# Allegro board P1_PCB_rev1.brd
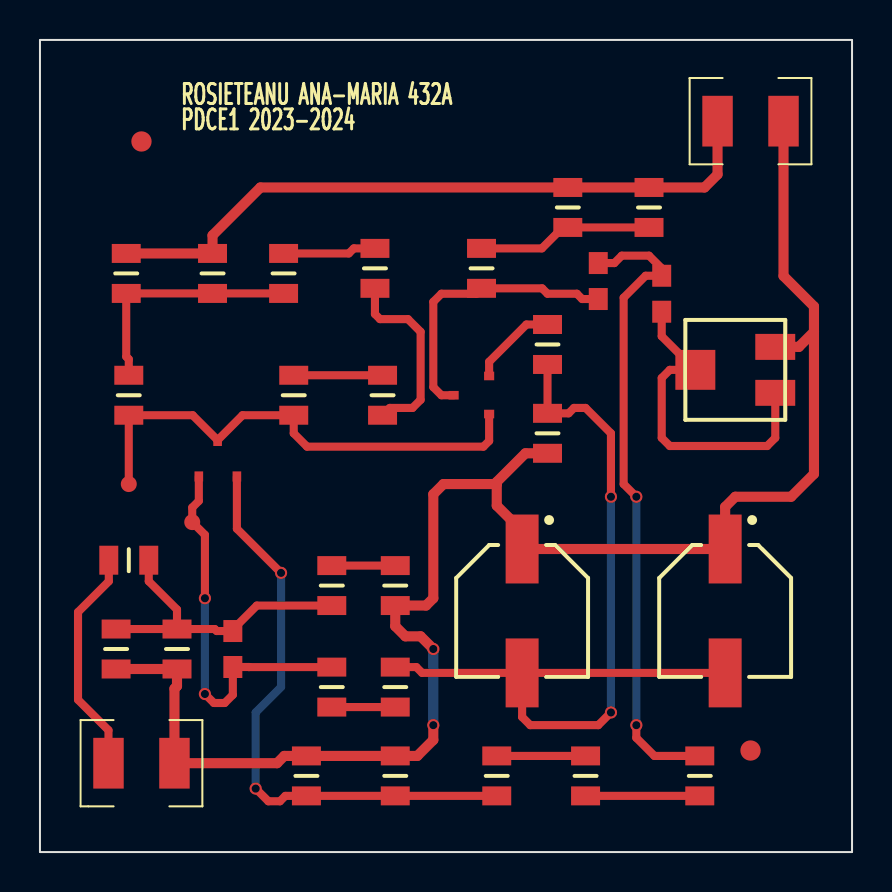
[diagram p0: board, top side]
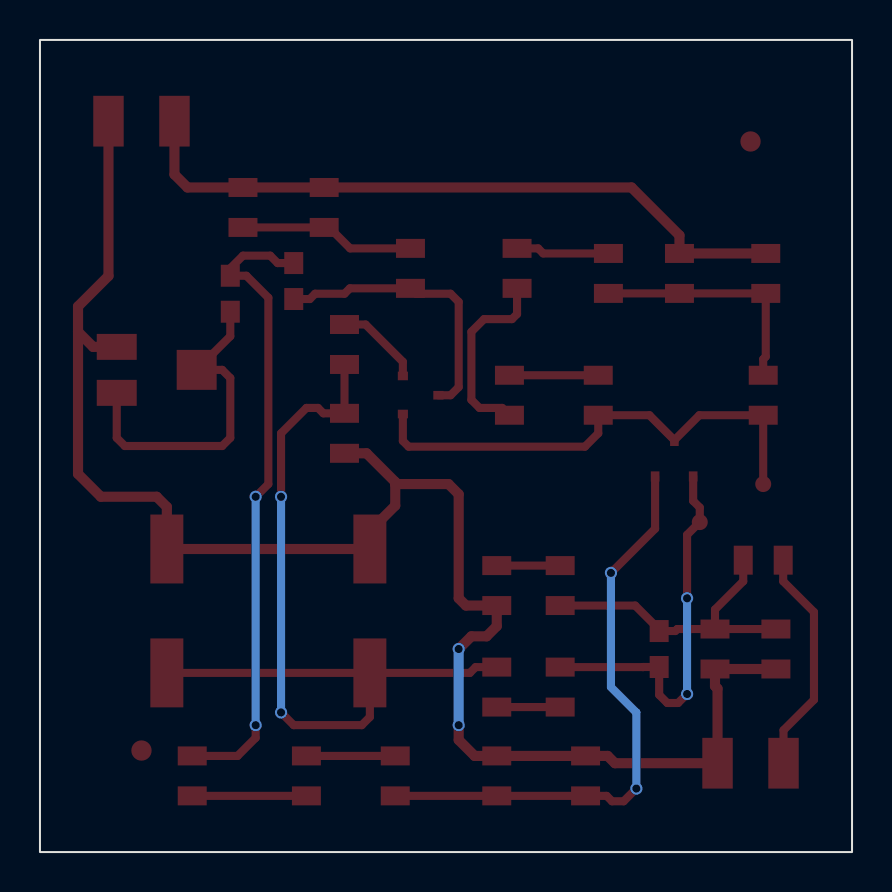
[diagram p1: board, bottom side, seen from below]

Outline 40.64 x 40.64 mm; copper layers: TOP, BOTTOM. Coordinates in mm from the lower left corner of the outline.
Outline path: rectangle 0,0 40.64,40.64

## Design rules (mm)
nets with their own width: min track width 0.406; nets N14891 N15039 N15045 N15123 N15129 N15133 N15223 N15237 N15255 N15309 N15347 N15389 N15489 N15493 N15505 N15537 N15769 N16037 N16043
nets with their own width: min track width 0.508; nets 0 VCC

## Placement (name value [footprint] x y rotation side)
C1  4.7u  [CAPC2008X126N_0805]  9.65 10.16 270 top
C2  4.7u  [CAPC2008X126N_0805]  27.94 28.57 90 top
C3  4.7u  [CAPC2008X126N_0805]  31.11 27.94 270 top
C4  10u  [CAPAE660X770N]  24.13 12.06 270 top
C5  10u  [CAPAE660X770N]  34.29 12.06 270 top
J1  CON2  [1210RF_WV_12D]  5.08 4.45 180 top
J2  CON2  [1210RF_WV_12D]  35.56 36.58 0 top
NOREF  Value  [unnamed]  5.08 35.56 0 top
NOREF#2  Value  [unnamed]  35.56 5.08 0 top
Q1  BC846B  [SOT23]  8.89 19.68 90 top
Q2  BC846B  [SOT23]  21.59 22.86 180 top
R1  100k  [RES2012X50N_0805]  6.86 10.16 90 top
R2  180k  [RES2012X50N_0805]  17.14 22.86 90 top
R3  2k  [RES2012X50N_0805]  13.34 3.81 270 top
R4  10k  [RES2012X50N_0805]  22.1 29.21 90 top
R5  1k  [RES2012X50N_0805]  25.4 20.95 90 top
R6  180k  [RES2012X50N_0805]  14.61 8.26 90 top
R7  22k  [RES2012X50N_0805]  22.86 3.81 270 top
R9  1  [RES2012X50N_0805]  25.4 25.4 90 top
R11  100k  [RES2012X50N_0805]  4.45 14.61 0 top
R12  1k  [RES2012X50N_0805]  14.61 13.34 270 top
R13  220k  [RES2012X50N_0805]  4.32 28.96 270 top
R14  50k  [TRIM_BI_23AN]  34.8 24.13 0 top
R15  68k  [RES2012X50N_0805]  33.02 3.81 90 top
R17  10k  [RES2012X50N_0805]  27.3 3.81 270 top
R18  150k  [RES2012X50N_0805]  8.64 28.96 270 top
R19  220k  [RES2012X50N_0805]  4.45 22.86 90 top
R20  180k  [RES2012X50N_0805]  17.78 8.26 90 top
R22  10k  [RES2012X50N_0805]  26.42 32.26 90 top
R23  10k  [RES2012X50N_0805]  30.48 32.26 90 top
R24  3.3k  [RES2012X50N_0805]  17.78 13.34 90 top
R25  2k  [RES2012X50N_0805]  17.78 3.81 270 top
R26  15k  [RES2012X50N_0805]  12.19 28.96 270 top
R27  15k  [RES2012X50N_0805]  12.7 22.86 270 top
R28  10k  [RES2012X50N_0805]  16.76 29.21 90 top
R29  100k  [RES2012X50N_0805]  3.81 10.16 90 top
TP1  CON1  [TP80]  7.62 16.51 0 top
TP2  CON1  [TP80]  4.45 18.41 0 top

## Library data of the parts
C1-C5 = C
J1 J2 = CON2
Q1 Q2 = BC846B
R1-R7 R9 R11-R13 R15 R17-R20 R22-R29 = R
R14 = POT
TP1 TP2 = CON1

## Footprints (pads in the part's own frame, mm; a bottom-side part is the same pattern mirrored in y, then rotated)
1210RF_WV_12D
  rect 1.524x2.54 smd: 1(-1.651,0) 2(1.651,0)
CAPAE660X770N
  rect 3.45x1.65 smd: 1(-3.1,0) 2(3.1,0)
CAPC2008X126N_0805
  rect 1.1x0.95 smd: 1(-0.9,0) 2(0.9,0)
RES2012X50N_0805
  rect 0.95x1.45 smd: 1(-1,0) 2(1,0)
SOT23
  rect 0.508x0.432 smd: 1(-0.889,0.94) 2(-0.889,-0.965) 3(0.889,0)
TP80
  round 0.8 smd: 1(0,0)
TRIM_BI_23AN
  rect 2x1.3 smd: 1(2,1.15) 2(2,-1.15)
  rect 2x2 smd: 3(-2,0)
unnamed
  round 1.016 smd: 1(0,0)

## Nets
VCC: J2.1 R13.1 R18.1 R22.2 R23.2
0: C4.1 C5.1 J1.1 J2.2 R1.1 R3.1 R5.1 R14.1 R24.1 R25.1 R29.1
N14891: R13.2 R18.2 R19.2 R26.2
N15039: R26.1 R28.2
N15045: R4.2 R22.1 R23.1
N15123: R2.1 R28.1
N15129: C2.1 Q2.3 R4.1
N15133: Q1.3 Q2.1 R19.1 R27.2 TP2.1
N15223: C2.2 C3.1 R15.2
N15237: C3.2 R14.2(T) R14.3
N15255: R2.2 R27.1
N15309: Q2.2(E) R9.2
N15347: C1.2 Q1.1 R6.2 TP1.1
N15389: Q1.2(E) R3.2 R7.2 R25.2
N15489: C4.2 C5.2 R5.2 R9.1 R20.2
N15493: J1.2 R11.1
N15505: C1.1 R1.2 R11.2 R12.2 R29.2
N15537: R6.1 R20.1
N15769: R12.1 R24.2
N16037: R7.1 R17.1
N16043: R15.1 R17.2

Pads without a net: NOREF 1; NOREF#2 1

## Via types
v1: diameter 0.61, hole 0.406, TOP to BOTTOM, 10 vias

## Routing (per net, layer and track width the routed paths; a pad name or vN(x,y) marks a point on that pad's centre or on a via; arc(x,y) is an arc through that point)
VCC: length 34.4
  TOP w0.508: J2.1 33.91,33.91 33.26,33.26 R23.2 R22.2 11.03,33.26 8.64,30.86 R18.1 R13.1
0: length 84.8
  TOP w0.508: v1(19.68,6.35) 19.68,5.61 18.89,4.81 R25.1 R3.1 12.23,4.81 11.86,4.45 J1.1 6.73,8.18 6.86,8.3 R1.1 R29.1 ; 38.73,26.04 38.73,18.92 37.59,17.78 34.8,17.78 34.29,17.27 C5.1 C4.1 24.13,16.07 22.86,17.34 22.86,18.41 ; 38.73,26.04 38.73,27.3 37.21,28.83 J2.2 ; 38.73,26.04 37.98,25.28 R14.1 ; 22.86,18.41 20.19,18.41 19.68,17.91 19.68,12.7 19.32,12.34 R24.1 17.78,11.3 18.29,10.79 19.05,10.79 v1(19.68,10.16) ; 22.86,18.41 22.86,18.52 24.29,19.96 R5.1
  BOTTOM w0.508: v1(19.68,6.35) v1(19.68,10.16)
N14891: length 12
  TOP w0.406: R26.2 R18.2 R13.2 4.32,24.79 4.45,24.67 R19.2
N15039: length 4.7
  TOP w0.406: R28.2 15.71,30.21 15.45,29.96 R26.1
N15045: length 8.8
  TOP w0.406: R23.1 R22.1 26.17,31.26 25.12,30.21 R4.2
N15123: length 9.6
  TOP w0.406: R28.1 16.76,26.92 17.02,26.67 18.41,26.67 19.05,26.04 19.05,22.63 18.64,22.23 17.51,22.23 R2.1
N15129: length 14.2
  TOP w0.406: C2.1 27.13,27.68 26.87,27.94 25.4,27.94 25.13,28.21 R4.1 21.83,27.94 20.09,27.94 19.68,27.53 19.68,23.27 20.09,22.86 Q2.3
N15133: length 25.2
  TOP w0.406: Q2.1 22.48,20.57 22.19,20.29 13.37,20.29 12.7,20.95 R27.2 10.14,21.86 8.89,20.61 ; 8.89,20.61 Q1.3 ; 8.89,20.61 7.64,21.86 R19.1 TP2.1
N15223: length 32.2
  TOP w0.406: R15.2 30.75,4.81 29.84,5.71 v1(29.84,6.35) ; v1(29.84,17.78) 29.21,18.41 29.21,27.74 30.31,28.84 C3.1 31.11,29.21 30.48,29.84 29.12,29.84 28.75,29.47 C2.2
  BOTTOM w0.406: v1(29.84,17.78) v1(29.84,6.35)
N15237: length 16.7
  TOP w0.406: R14.2 36.8,20.73 36.39,20.32 31.52,20.32 31.11,20.73 31.11,23.72 31.52,24.13 R14.3 31.11,25.81 C3.2
N15255: length 4.4
  TOP w0.406: R2.2 R27.1
N15309: length 4.4
  TOP w0.406: Q2.2 22.48,24.53 24.34,26.4 R9.2
N15347: length 19.4
  TOP w0.406: v1(8.26,12.7) 8.26,15.88 TP1.1 7.62,17.24 7.95,17.57 Q1.1 ; R6.2 10.46,9.25 10.46,9.26 C1.2 9.65,7.87 9.25,7.46 8.7,7.46 v1(8.26,7.91)
  BOTTOM w0.406: v1(8.26,12.7) v1(8.26,7.91)
N15389: length 29.5
  TOP w0.406: Q1.2 9.86,16.18 v1(12.06,13.97) ; v1(10.79,3.17) 11.43,2.54 12.01,2.54 12.28,2.81 R3.2 R25.2 R7.2
  BOTTOM w0.406: v1(12.06,13.97) 12.06,8.26 10.79,6.99 v1(10.79,3.17)
N15489: length 43.9
  TOP w0.406: C5.2 C4.2 ; C4.2 19.13,8.96 18.84,9.25 R20.2 ; C4.2 24.13,6.76 24.54,6.35 27.94,6.35 v1(28.57,6.99) ; v1(28.57,17.78) 28.57,20.95 27.3,22.23 26.73,22.23 26.46,21.95 R5.2 R9.1
  BOTTOM w0.406: v1(28.57,6.99) v1(28.57,17.78)
N15493: length 11.4
  TOP w0.406: R11.1 3.45,13.55 1.91,12.01 1.91,7.62 3.43,6.1 3.43,4.45
N15505: length 15.4
  TOP w0.406: R12.2 10.85,12.34 9.65,11.14 C1.1 8.85,11.06 8.75,11.16 R1.2 ; R11.2 5.44,13.55 6.86,12.14 R1.2 ; R1.2 R29.2
N15537: length 3.2
  TOP w0.406: R20.1 R6.1
N15769: length 3.2
  TOP w0.406: R24.2 R12.1
N16037: length 4.4
  TOP w0.406: R17.1 R7.1
N16043: length 5.7
  TOP w0.406: R17.2 R15.1

## Text on the board
Ref Des/Silkscreen Top: ROSIETEANU ANA-MARIA 432A | PDCE1 2023-2024
XSECTION_CHART: *  SURFACE | L1 TOP CONDUCTOR | *  DIELECTRIC | L2 BOTTOM CONDUCTOR | DESIGN CROSS SECTION CHART | ___________________________ | TOTAL THICKNESS 63 MIL | 1-2
DISPLAY_TOP: FIGURE | FINISHED_SIZE | 16.0 | DRILL CHART: TOP to BOTTOM | ALL UNITS ARE IN MILS | PLATED | QTY | 10
